# Altium PCB 24 to 12V regulator.PcbDoc
Units mil, origin at the board's own origin, x right, y up, seen from the top; angles counter-clockwise.
Board outline 810.03 x 3710.03 mil, 2 copper layers (Top Layer, Bottom Layer); 14 components, 5 nets, 31 pads, 0 vias.
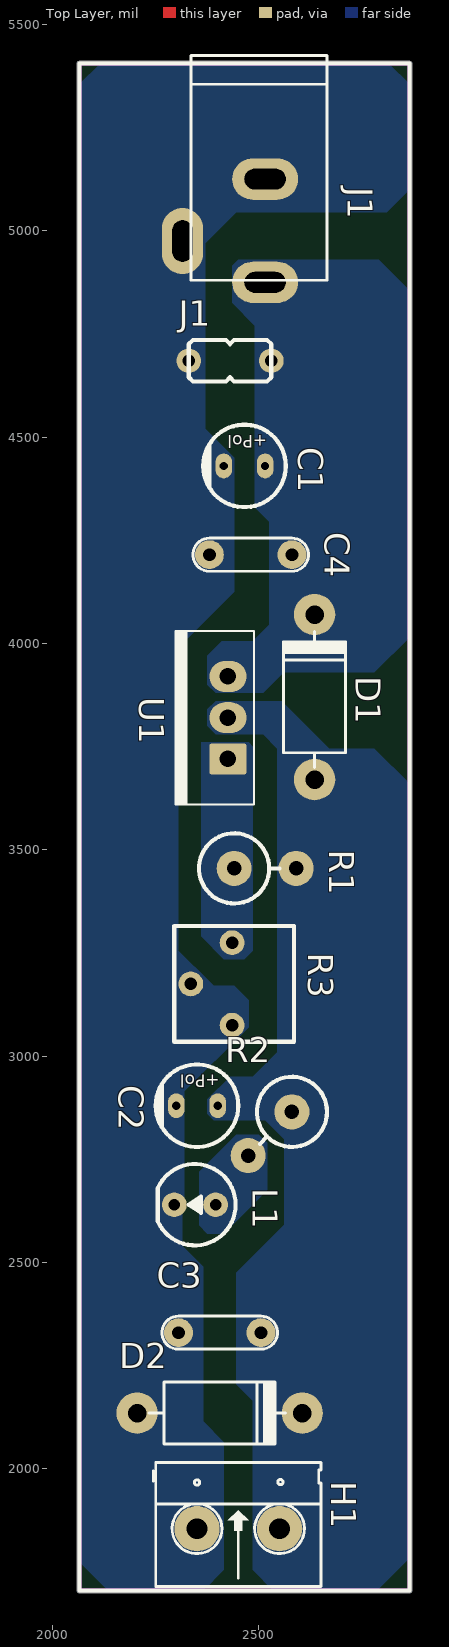
[diagram p0: Top Layer view]
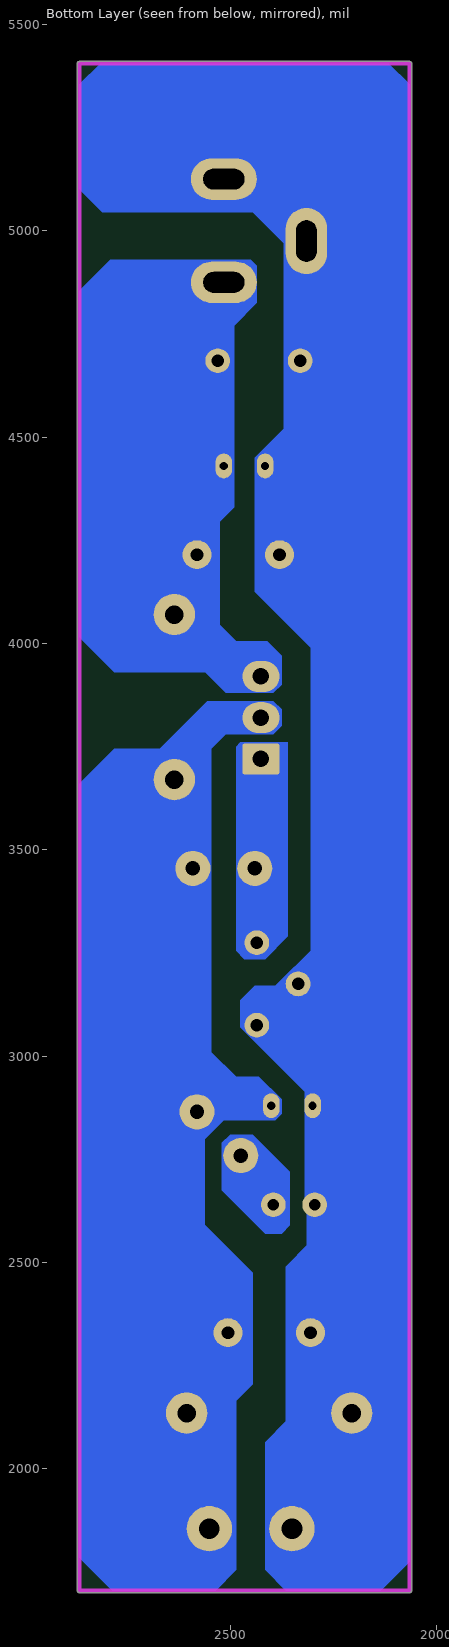
[diagram p1: Bottom Layer view, seen from below]

## Layer stack, top to bottom
Top Solder: solder mask 0.4, Solder Resist, Dk 3.5
Top Layer: signal copper 1.4
Dielectric 1: dielectric 12.6, FR-4, Dk 4.8
Bottom Layer: signal copper 1.4
Bottom Solder: solder mask 0.4, Solder Resist, Dk 3.5

## Board outline
2059.99,5405 cw(c2065,5405) 2065,5410.02 2865,5410.02 cw(c2865,5405) 2870.01,5405 2870.01,1705 cw(c2865,1705) 2865,1699.98 2065,1699.98 cw(c2065,1705) 2059.99,1705

## Design rules (kind name [scope] priority, off if disabled: settings)
Clearance [All] p1: gap=10 ignorepadtopadclearanceinfootprint=FALSE except(0: Arc-Hole Track-Hole SMDPad-Hole THPad-Hole Via-Hole Fill-Hole Poly-Hole Region-Hole Text-Hole)
PolygonConnect [All] p1: connectstyle=Relief reliefconductorwidth=10 reliefentries=4 polygonreliefangle="90 Angle" airgapwidth=10
RoutingVias [All] p1: holewidth=28 width=50 viastyle="Through Hole" minholewidth=28 minwidth=50 maxholewidth=28 maxwidth=50
SolderMaskExpansion [All] p1: expansion=4
Width [All] p1: maxlimit=98.43 minlimit=27.56 preferedwidth=39.37 minimp=50.000000 maximp=50.000000 favimp=50.000000
30 further rules are at their usual default settings.

## Classes and differential pairs
component class "24 to 12V regulator": C1 C2 C3 C4 D1 D2 H1 J1 L1 R1 R2 R3 U1

## Components (designator, comment, footprint, x,y, rotation, side; value= is the part's Value field where it differs from the comment)
C1 "22uF" Pol_200mil 2465,4430 r180 top
C2 "1uF" Pol_200mil 2350,2880 r180 top
C3 "105" CAP_2 2405,2330 r0 top
C4 "105" CAP_2 2480,4215 r0 top
D1 "Diode" Diode 2635,3870 r0 top
D2 "Diode" Diode 2405,2135 r270 top
H1 "HD_2" "Header 2" 2450,1815 r0 top
J1 "JP_2" JP_2 2480,4685 r180 top (schematic designator J?)
J1 "24V input" "JDC - 5.5" 2515,5060 r180 top
L1 "LED" LED-200mil 2345,2640 r180 top
R1 "220R" RES_VERTICAL 2440,3455 r0 top
R2 "1k2" RES_VERTICAL 2580,2865 r225 top
R3 "POT_RES" POT_5 2385,3175 r90 top
U1 "LM317T" LM317T 2425,3820 r90 top

## Footprints (in the part's own frame and the unit in brackets; to place one, negate y for a bottom-side part, rotate by r counter-clockwise, add the part's x,y. Pads: shape width x height; smd on the part's side, far side on the other; paste and mask are expansions set on the pad)
CAP_2 [mil]
  round 70 hole 31: 1(-100,0) 2(100,0)
  silkscreen extent -140,-40 140,40, body extent -163,-80 163,79, height 363
Diode [mil]
  round 100 hole 45: A(0,-200) C(0,200)
  silkscreen extent -75,-171 75,159, body extent -50,-215 51,215, height 100
"Header 2" [mil]
  round 110 hole 50: 1(-100,40) 2(100,40)
  silkscreen extent -206,-100 200,200, body extent -194,-95 200,200, height 394
"JDC - 5.5" [mil]
  oval 160x100 hole 50 slot 100 at 0 deg: 1(0,185) 2(0,-65)
  oval 100x160 hole 50 slot 100 at 90 deg: 3(200,85)
  silkscreen extent -150,-365 180,180, body extent -169,-350 205,194, height 434
JP_2 [mil] "jump"
  round 60 hole 30: 1(-50,0) 2(150,0)
  silkscreen extent -50,-50 150,50, body extent -50,-50 150,50, height 336
LED-200mil [mil] "LED 2 chân size 200x350-mil"
  round 60 hole 27.56: A(-50,0) C(50,0)
  silkscreen extent -98,-98 90,98, body extent -122,-122 122,123, height 340
LM317T [mil]
  rrect15% 75x90 hole 40 paste-73.23: 1(-100,0)
  oval 75x90 hole 40 paste-73.23: 2(0,0) 3(100,0)
  silkscreen extent -210,-63 210,127, body extent -210,-61 210,129, height 900
Pol_200mil [mil] "electrolytic capacitor, T? phân c?c 200x440mil, kho?ng cách pins 100mil"
  oval 40x60 hole 20: +(-50,0) -(50,0)
  silkscreen extent -100,-100 100,100
POT_5 [mil]
  round 60 hole 30: 1(-100,-50) 2(0,50) 3(100,-50)
  silkscreen extent -140,-200 140,90, body extent -200,-196 130,88, height 185
RES_VERTICAL [mil]
  round 85 hole 35: 1(0,0) 2(150,0)
  silkscreen extent -85,-85 110,85

## Part data
C1 C2: library part Pol-Cap, "T? di?n phân c?c"
C3 C4: library part Cap
J1: library part "Jack DC - F"
R1 R2: library part RES, "di?n tr? size nh?"
R3: "Potentiometer"
U1: "A adjustable positive linear voltage regulator. Output voltage range: 1.25-37V. Difference voltage (Vo"

## Nets (pads, with @x,y where several pads share a name; then routed paths per layer and width w, separated by ;. In a path a pad name is that pad's centre, name@x,y a point inside that pad or via, vN(x,y) a via of type N, cw(c..) or ccw(c..) an arc to the next point about the centre after c; other vN are vias at no path point)
GND: C1.- C2.- C3.1 C4.1 D2.A H1.1 J1.2 J1.3 L1.C R3.1 R3.2 | length 3752.9
  Bottom Layer w39.37: J1.3 2315,4750 2330,4735 2330,4685 2330,4515 2380,4465 ; H1.1 2205,2000 D2.A 2205,2230 C3.1 2295,2340 L1.C 2300,2645 C2.- 2300,2940 R3.1 R3.2 2285,3225 2285,4120 C4.1 2380,4465 ; C1.- 2380,4465
  Bottom Layer w98.43: J1.3 2315,5025 2415,5125 J1.2@2515,5125
NetC1_+: C1.+ C4.2 D1.C J1.1 U1.3 | length 711.7
  Bottom Layer w39.37: U1.3 U1.3@2427.5,3922.5 ; J1.1@2515,4875 C1.+ 2580,4365 C4.2 C4.2@2565,4200
NetC2_+: C2.+ C3.2 D1.A D2.C H1.2 R1.2 R2.1 U1.2 | length 2160.1
  Bottom Layer w39.37: C2.+ 2565,2880 R2.1 ; U1.2 U1.2@2427.5,3817.5 ; H1.2 2605,1910 D2.C 2605,2230 C3.2 2580,2405 R2.1 ; D1.A 2635,3500 R1.2 2635,3410 2635,2920 R2.1
NetL1_A: L1.A R2.2 | length 151.6
  Bottom Layer w39.37: L1.A 2473.93,2718.93 R2.2
NetR1_1: R1.1 R3.3 U1.1 | length 453.3
  Bottom Layer w39.37: U1.1 2425,3470 R1.1 2440,3280 R3.3

## Keep-outs
Keep-Out Layer:
  lines w10: 2065,1705 2865,1705 2865,5405 2065,5405 2065,1705

## Other copper
Bottom Layer:
  region: 2475,3760 2360,3760 2360,3290 2415,3235 2465,3235 2485,3255 2485,3750
  region net NetL1_A: 2520,2675 2415,2570 2375,2570 2355,2590 2355,2720 2445,2810 2500,2810 2520,2790
  region net NetC1_+: 2410,4005 2375,3970 2375,3900 2395,3880 2510,3880 2560,3930 2780,3930 2865,4015 2865,4855 2790,4930 2450,4930 2435,4915 2435,4825 2490,4770 2490,4330 2525,4295 2525,4045 2485,4005
  region net GND: 2115,5405 2065,5355 2065,1775 2135,1705 2365,1705 2415,1755 2415,2065 2365,2115 2365,2490 2310,2545 2310,2905 2475,3070 2475,3135 2440,3170 2390,3170 2295,3265 2295,3980 2440,4125 2440,4450 2370,4520 2370,4970 2445,5045 2810,5045 2865,5100 2865,5355 2815,5405
  pour cut-out: 2322.5,4742.5 2332.18,4732.82 2328.48,4748.48
  pour cut-out: 2380,4510 2386.27,4503.73 2380,4530.29
  region: 2080,2570
  region net NetC2_+: 2395,3860 2375,3840 2375,3800 2395,3780 2510,3780 2545,3745 2545,3010 2485,2950 2430,2950 2375,2895 2375,2860 2390,2845 2515,2845 2560,2800 2580,2800 2580,2610 2445,2475 2445,2205 2485,2165 2485,1755 2535,1705 2785,1705 2865,1785 2865,3660 2780,3745 2670,3745 2555,3860
  region: 2440,4920

## Silkscreen, mask and mechanical layers (free items; w line width, h text height)
Top Overlay:
  lines w10: 2065,1705 2865,1705 2865,5405 2065,5405 2065,1705

## Text inside footprints (layer, text, board x,y; h text height)
C1: Top Overlay "+Pol" at 2520,4505 h30 r180
C2: Top Overlay "+Pol" at 2405,2955 h30 r180